# Altium PCB cable_test.PcbDoc (part 1 of 2)
Units mm, origin at the board's own origin, x right, y up, seen from the top; angles counter-clockwise.
Board outline 86.36 x 42.42 mm, 4 copper layers (Top Layer, GND, VCC, Bottom Layer), stack 1.873 mm thick; 118 components, 85 nets, 386 pads, 247 vias.
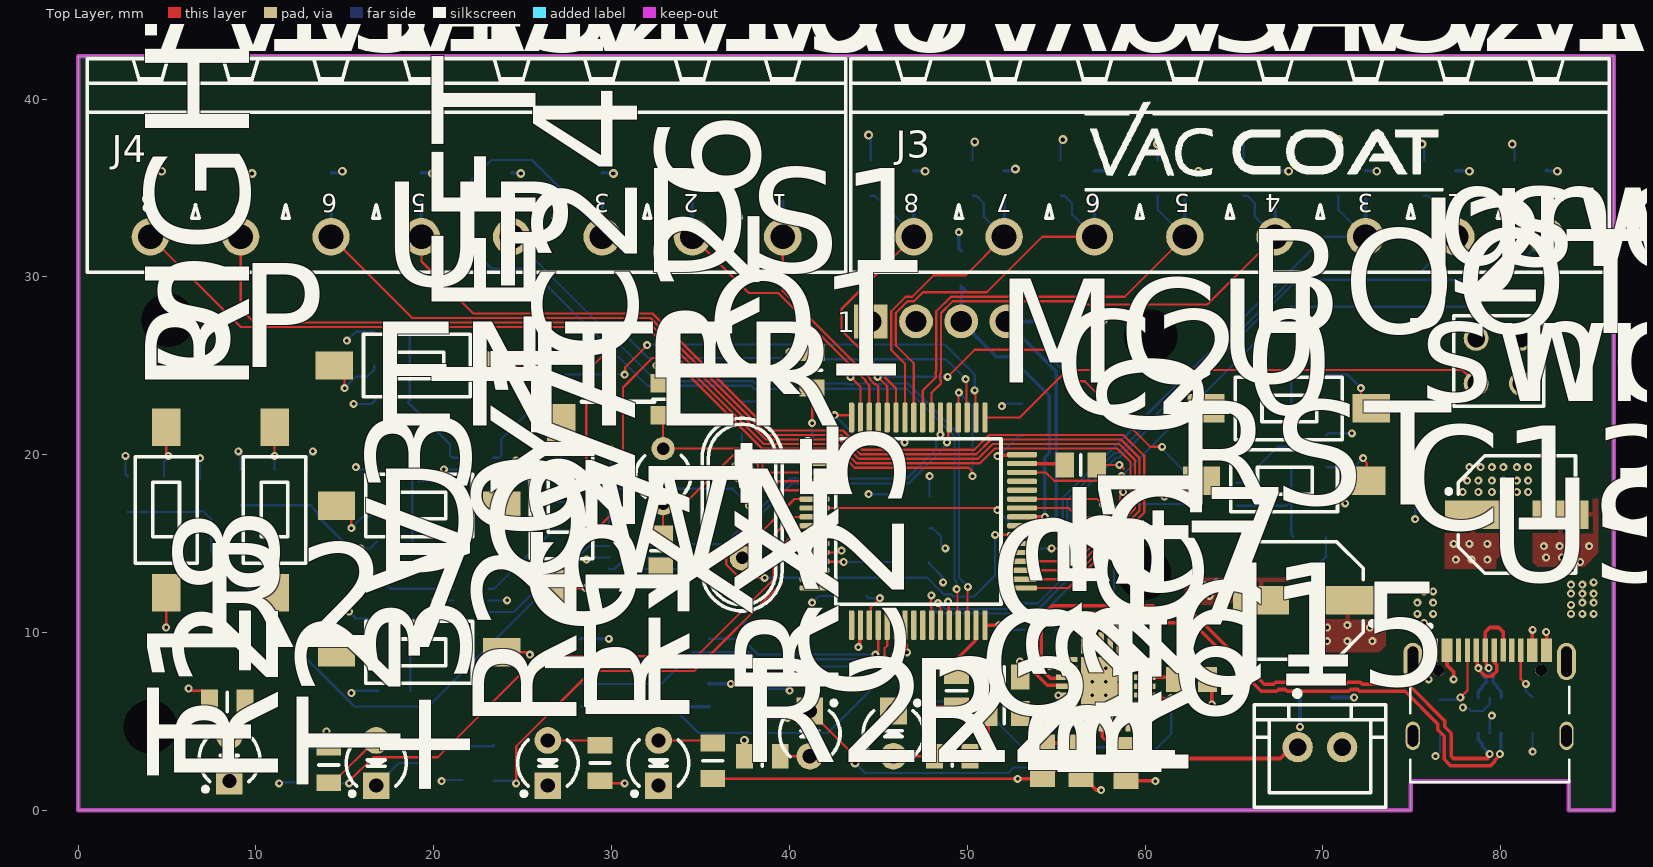
[diagram p0: Top Layer view]
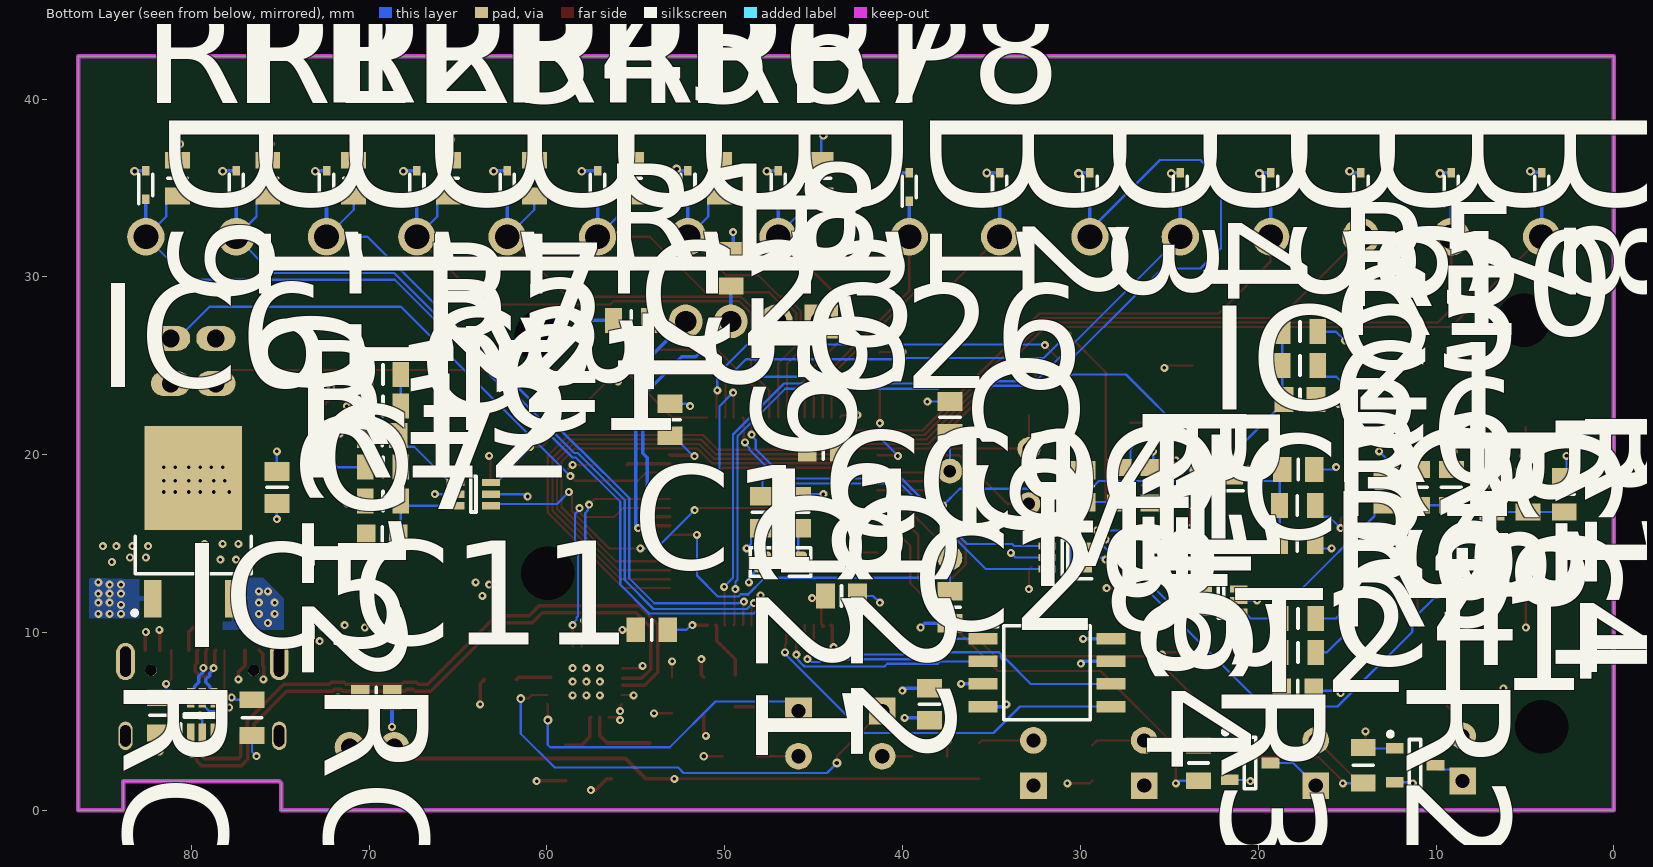
[diagram p1: Bottom Layer view, seen from below]
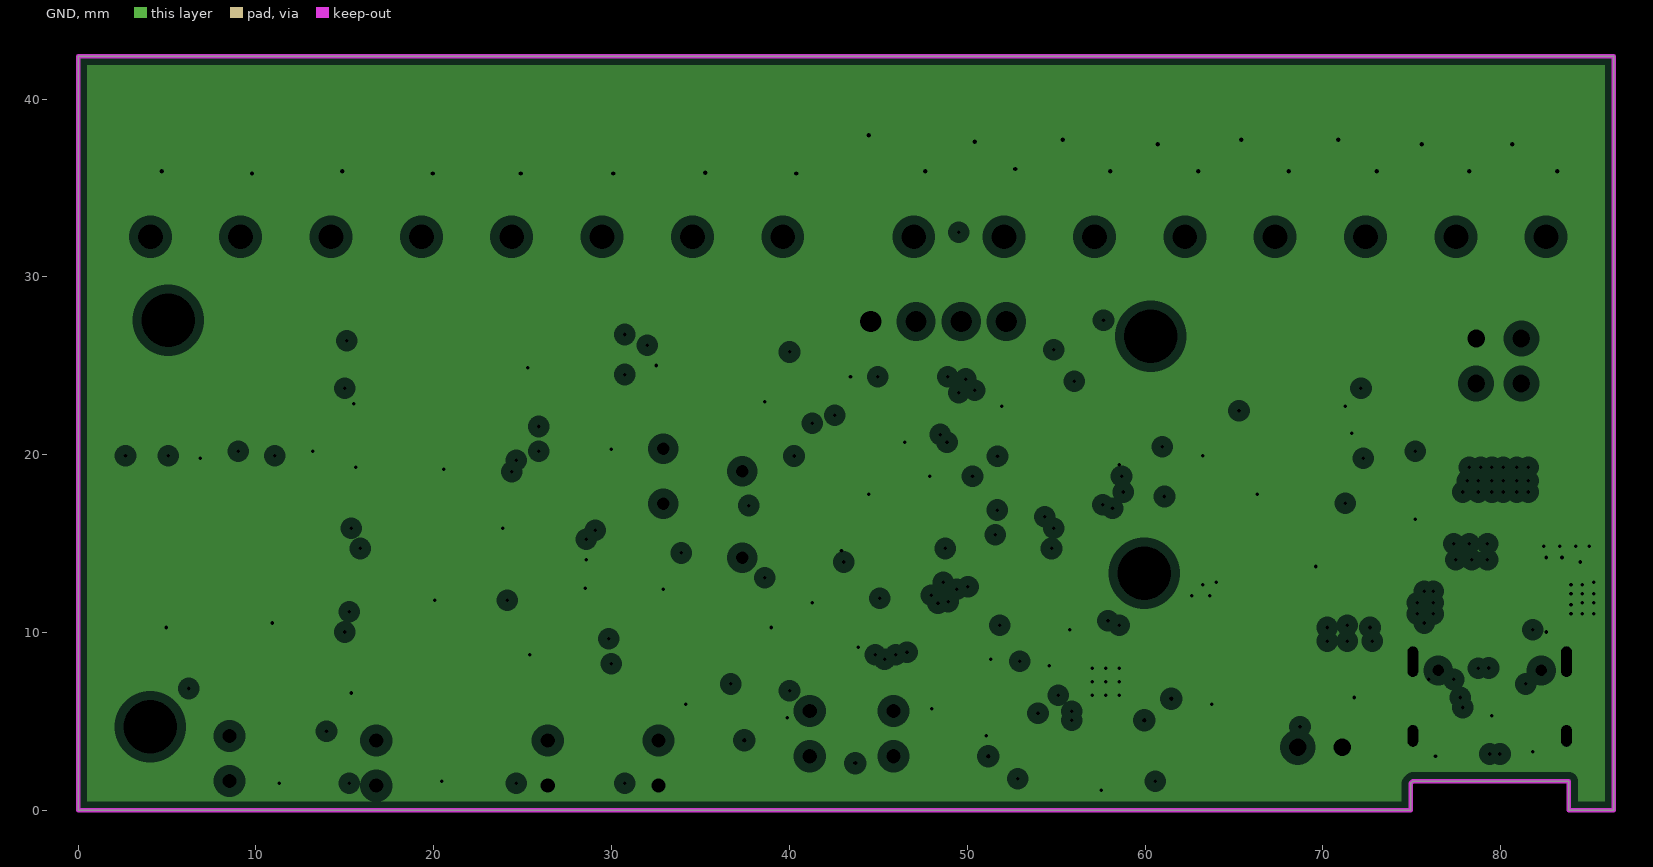
[diagram p2: GND, clearances drawn from the general rule]
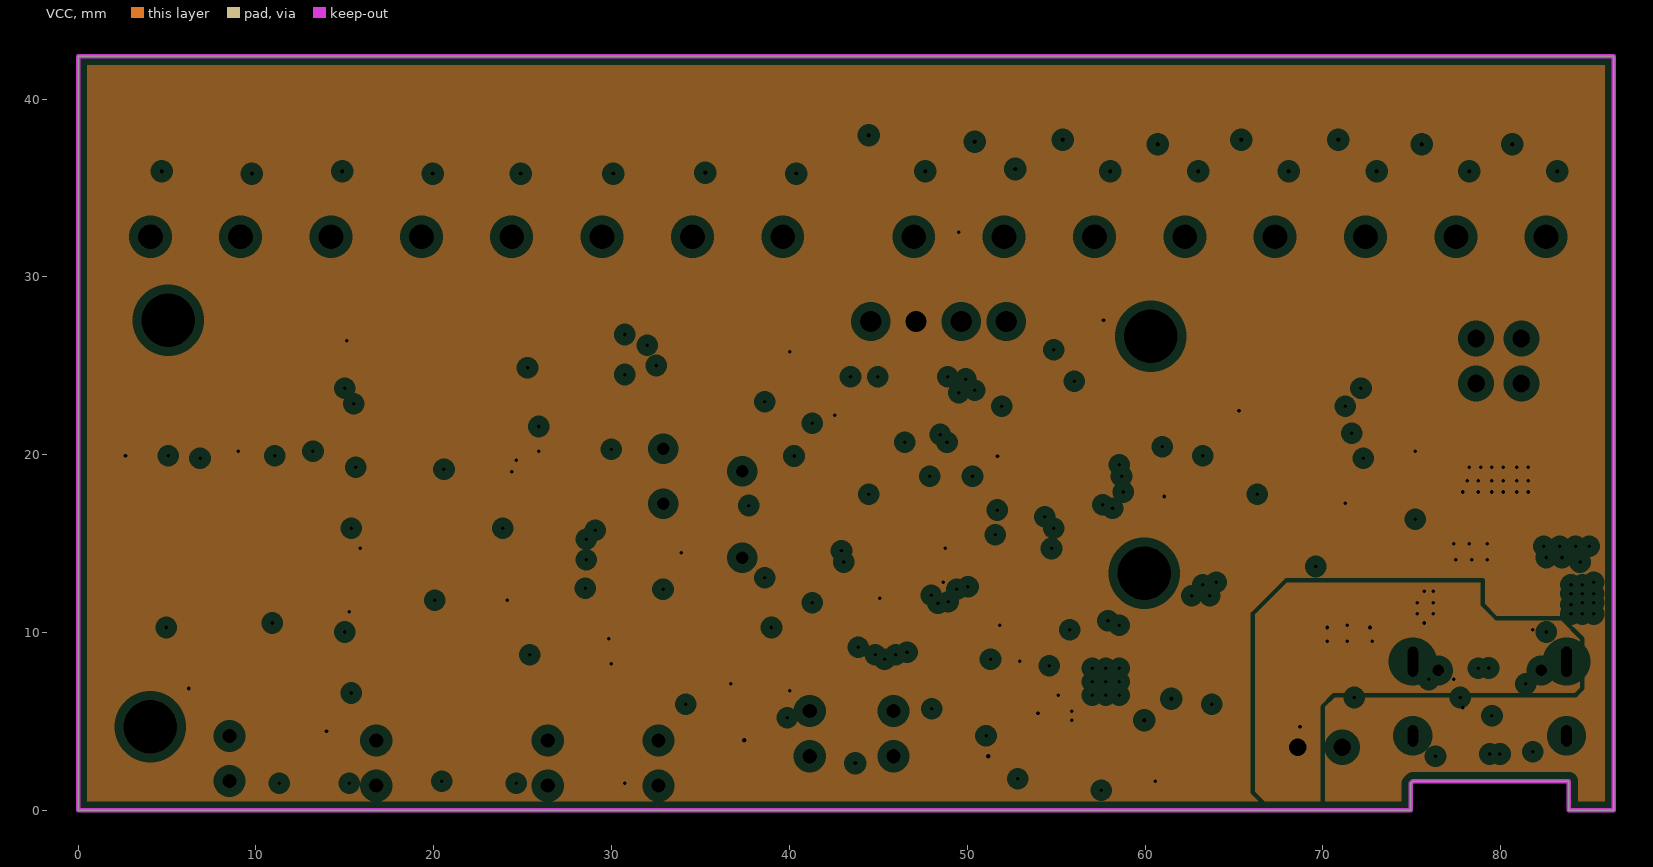
[diagram p3: VCC, clearances drawn from the general rule]

## Layer stack, top to bottom
Top Solder: solder mask 0.0102, Solder Resist, Dk 3.5
Top Layer: signal copper 0.0356
Dielectric 2: prepreg 0.0711, PP-006, Dk 4.1
GND: plane copper 0.035, net GND
Dielectric 1: dielectric 1.59, FR-4, Dk 4.8
VCC: plane copper 0.035, net (Multiple Nets)
Dielectric 3: prepreg 0.0711, PP-006, Dk 4.1
Bottom Layer: signal copper 0.0356
Bottom Solder: solder mask 0.0102, Solder Resist, Dk 3.5

## Board outline
0,0 0,42.418 86.36,42.418 86.36,0 83.82,0 83.82,1.651 75.057,1.651 74.93,1.524 74.93,0

## Design rules (kind name [scope] priority, off if disabled: settings)
Clearance [All] p1: gap=0.127 ignorepadtopadclearanceinfootprint=FALSE
DiffPairsRouting [All] p1: maxlimit=0.2 minlimit=0.2 mostfreqgap=0.2 toplayer_minwidth=0.2 toplayer_maxwidth=0.2 toplayer_prefwidth=0.2 bottomlayer_minwidth=0.2 bottomlayer_maxwidth=0.2 bottomlayer_prefwidth=0.2 maxuncoupledlength=12.7
PlaneClearance [All] p1: clearance=0.508
PlaneConnect [All] p1: planeconnectstyle=Relief reliefexpansion=0.508 reliefentries=4 reliefconductorwidth=0.254 reliefairgap=0.254
PolygonConnect [All] p1: connectstyle=Relief reliefconductorwidth=0.254 reliefentries=4 polygonreliefangle="90 Angle" airgapwidth=0.254
RoutingVias [All] p1: holewidth=0.2 width=0.45 viastyle="Through Hole" minholewidth=0.2 minwidth=0.45 maxholewidth=0.25 maxwidth=0.5
SolderMaskExpansion [All] p1: expansion=0.102 istentingtop=FALSE
SupplyNets "Schematic Supply Nets_1" [InNet('GND')] p1: voltage=0.000
SupplyNets "Schematic Supply Nets_2" [InNet('3V3')] p2: voltage=0.000
SupplyNets "Schematic Supply Nets" [InNet('+5')] p3: voltage=0.000
Width [All] p1: maxlimit=0.2 minlimit=0.127 preferedwidth=0.15
27 further rules are at their usual default settings.

## Classes and differential pairs
differential pair USB_FS: +USB_FS_P -USB_FS_N
differential pair D: +D_P -D_N

## Components (designator, comment, footprint, x,y, rotation, side; value= is the part's Value field where it differs from the comment)
+3V3 "Yellow" LED_3MM_YELLOW_1C-2A 26.416,2.667 r90 top (schematic designator LD2)
+5V "Yellow" LED_3MM_YELLOW_1C-2A 32.639,2.667 r90 top (schematic designator LD1)
BOOT "Push Button" PB_TYCO_FSMSM 68.072,22.606 r0 top (schematic designator BOOT1)
C1 "100nF" CAPC2012X135N 17.746,19.177 r0 bottom
C2 "100nF" CAPC2012X135N 69.265,21.082 r180 bottom
C3 "100nF" CAPC2012X135N 12.827,18.111 r270 bottom
C4 "100nF" CAPC2012X135N 17.78,6.731 r0 bottom
C5 "100nF" CAPC2012X135N 17.653,23.114 r0 bottom
C6 "100nF" CAPC2012X135N 6.858,17.73 r270 bottom
C7 "100nF" CAPC2012X135N 69.265,15.367 r180 bottom
C8 "100nF" CAPC2012X135N 29.845,18.238 r270 bottom
C9 "22pF" CAPC2012X135N 37.338,22.098 r270 bottom
C10 "68uF" CAPAE660X540N 68.961,11.811 r180 top
C11 "100nF" CAPC2012X135N 69.596,6.35 r180 bottom
C12 "100nF" CAPC2012X135N 75.184,18.161 r90 bottom
C13 "68uF" CAPAE660X540N 80.899,16.637 r0 top
C14 "22pF" CAPC2012X135N 37.338,11.43 r90 bottom
C15 "4.7u" CAPC2012X135N 62.611,7.366 r180 top
C16 "100nF" CAPC2012X135N 52.07,5.461 r0 top
C17 "100nF" CAPC2012X135N 52.07,7.493 r0 top
C18 "100nF" CAPC2012X135N 54.102,10.16 r180 bottom
C19 "100nF" CAPC2012X135N 43.434,12.065 r180 bottom
C20 "2.2uF" CAPC2012X135N 56.388,19.431 r0 top
C21 "100nF" CAPC2012X135N 47.879,16.764 r270 bottom
C22 "100nF" CAPC2012X135N 45.847,16.764 r270 bottom
C23 "100nF" CAPC2012X135N 53.086,21.971 r90 bottom
C24 "18pF" CAPC2012X135N 32.893,23.114 r270 top
C25 "2.2uF" CAPC2012X135N 49.403,6.731 r270 top
C26 "100nF" CAPC2012X135N 44.45,20.32 r180 bottom
C27 "18pF" CAPC2012X135N 32.766,14.605 r90 top
C28 "100nF" CAPC2012X135N 38.481,5.969 r270 bottom
D1 "PESD3V3L1UB,115" SODFL1608X65N 39.624,35.052 r90 bottom
D2 "PESD3V3L1UB,115" SODFL1608X65N 34.544,35.052 r90 bottom
D3 "PESD3V3L1UB,115" SODFL1608X65N 29.464,35.052 r90 bottom
D4 "PESD3V3L1UB,115" SODFL1608X65N 24.384,35.052 r90 bottom
D5 "PESD3V3L1UB,115" SODFL1608X65N 19.304,35.052 r90 bottom
D6 "PESD3V3L1UB,115" SODFL1608X65N 14.224,35.052 r90 bottom
D7 "PESD3V3L1UB,115" SODFL1608X65N 9.144,35.052 r90 bottom
D8 "PESD3V3L1UB,115" SODFL1608X65N 4.064,35.052 r90 bottom
D9 "PESD3V3L1UB,115" SODFL1608X65N 82.55,35.179 r90 bottom
D10 "PESD3V3L1UB,115" SODFL1608X65N 77.47,35.179 r90 bottom
D11 "PESD3V3L1UB,115" SODFL1608X65N 72.39,35.179 r90 bottom
D12 "PESD3V3L1UB,115" SODFL1608X65N 67.31,35.179 r90 bottom
D13 "PESD3V3L1UB,115" SODFL1608X65N 62.23,35.179 r90 bottom
D14 "PESD3V3L1UB,115" SODFL1608X65N 57.15,35.179 r90 bottom
D15 "PESD3V3L1UB,115" SODFL1608X65N 52.07,35.179 r90 bottom
D16 "PESD3V3L1UB,115" SODFL1608X65N 46.99,35.179 r90 bottom
DOWN "Push Button" PB_TYCO_FSMSM 19.177,8.89 r180 top (schematic designator DOWN1)
DS1 "MDOB128064V2V-WI" DS_MIDAS_MDOB128064V2V-WI 48.387,15.494 r0 top
ENTER "Push Button" PB_TYCO_FSMSM 19.177,17.145 r180 top (schematic designator ENTER1)
IC1 "74LVC2G17DW-7" SOT65P210X110-6N#1 64.135,17.78 r180 bottom
IC2 "74LVC2G17DW-7" SOT65P210X110-6N#1 22.352,19.177 r0 bottom
IC3 "74LVC2G17DW-7" SOT65P210X110-6N#1 22.098,11.811 r0 bottom
IC4 "74LVC2G17DW-7" SOT65P210X110-6N#1 30.861,14.224 r0 bottom
IC5 "" SOT65P210X110-6N#2 79.375,5.334 r90 bottom
IC6 "LD1117DT33CTR" TO228P972X240-3N-R540X510 79.883,16.256 r90 bottom
IC7 "CP2104-MINIEK" QFN50P400X400X80-25N-D 57.785,7.239 r0 top
J1 "Header 2" JST_B2B-XH-A(LF)(SN) 69.83,3.556 r180 top
J2 "Female Header dual 2" HDR_F_2X2 79.883,25.273 r90 top
J3 "" PHOENIX_1757307 64.77,32.258 r180 top
J4 "" PHOENIX_1757307 21.844,32.258 r180 top
L1 "Inductor SMD NC 0805" L0805 46.863,13.97 r180 bottom value=10uH
LEFT "Push Button" PB_TYCO_FSMSM 27.178,17.145 r90 top (schematic designator LEFT1)
M1 "W25Q64JVSSIQ_TR" SOIC127P790X216-8N 31.877,7.747 r180 bottom
MCU "STM32F405RGT6U" QFP50P1200X1200X160-64N 47.244,16.256 r0 top (schematic designator MCU1)
Q1 "8MHz" XTAL_CTS_ATS 37.338,16.637 r90 top
R1 "10K" RESC2012X60N 17.796,15.113 r180 bottom
R2 "10K" RESC2012X60N 69.215,22.733 r0 bottom
R3 "10K" RESC2012X60N 9.144,18.161 r90 bottom
R4 "10K" RESC2012X60N 17.764,10.795 r180 bottom
R5 "10K" RESC2012X60N 17.653,26.924 r180 bottom
R6 "1K" RESC2012X60N 17.796,17.145 r0 bottom
R7 "1K" RESC2012X60N 69.215,24.511 r180 bottom
R8 "1K" RESC2012X60N 11.049,18.161 r270 bottom
R9 "1K" RESC2012X60N 17.764,8.89 r0 bottom
R10 "1K" RESC2012X60N 17.653,25.019 r0 bottom
R11 "10K" RESC2012X60N 2.794,17.78 r90 bottom
R12 "10K" RESC2012X60N 69.215,17.399 r0 bottom
R13 "10K" RESC2012X60N 25.908,18.288 r90 bottom
R14 "1K" RESC2012X60N 4.826,17.78 r270 bottom
R15 "1K" RESC2012X60N 69.215,19.304 r180 bottom
R16 "1K" RESC2012X60N 27.813,18.288 r270 bottom
R17 "330" RESC2012X60N 35.687,2.794 r90 top
R18 "10K" RESC2012X60N 55.245,27.559 r0 bottom
R19 "10K" RESC2012X60N 49.657,30.48 r90 bottom
R20 "330" RESC2012X60N 29.337,2.667 r90 top
R21 "1K" RESC2012X60N 49.149,3.048 r180 top
R22 "1K" RESC2012X60N 38.481,3.048 r180 top
R23 "24K" RESC2012X60N 54.229,2.794 r270 top
R24 "10K" RESC2012X60N 58.928,2.667 r90 top
R25 "27K" RESC2012X60N 56.388,2.794 r90 top
R26 "0" RESC2012X60N 41.275,24.749 r270 top
R27 "330" RESC2012X60N 8.382,6.096 r180 top
R28 "330" RESC2012X60N 14.097,2.556 r90 top
R29 "330" RESC2012X60N 14.097,2.54 r90 bottom
R30 "330" RESC2012X60N 23.368,2.667 r90 bottom
RCC1 "5.1k" RESC2012X60N 76.581,5.223 r90 bottom
RCC2 "5.1k" RESC2012X60N 81.788,5.35 r90 bottom
RIGHT "Push Button" PB_TYCO_FSMSM 11.049,16.891 r90 top (schematic designator RIGHT1)
RP1 "10K" RESC2012X60N 80.772,35.56 r270 bottom
RP2 "10K" RESC2012X60N 75.692,35.56 r270 bottom
RP3 "10K" RESC2012X60N 70.866,35.56 r270 bottom
RP4 "10K" RESC2012X60N 65.532,35.56 r270 bottom
RP5 "10K" RESC2012X60N 60.706,35.56 r270 bottom
RP6 "10K" RESC2012X60N 55.245,35.56 r270 bottom
RP7 "10K" RESC2012X60N 50.292,35.56 r270 bottom
RP8 "10K" RESC2012X60N 44.577,35.56 r270 bottom
RST "Push Button" PB_TYCO_FSMSM 67.818,18.542 r0 top (schematic designator RST2)
RX1 "Yellow" LED_3MM_YELLOW_1C-2A 45.847,4.318 r270 top
SP "Push Button" PB_TYCO_FSMSM 4.953,16.891 r90 top (schematic designator RST1)
T1 "BC817-25" SOT95P230X110-3N 11.176,2.54 r180 bottom
T1 "Green" LED_3MM_GREEN_1C-2A 8.509,2.921 r90 top (schematic designator LD3)
T2 "BC817-25" SOT95P230X110-3N 20.454,2.667 r180 bottom
T2 "Green" LED_3MM_GREEN_1C-2A 16.764,2.667 r90 top (schematic designator LD4)
TX1 "Green" LED_3MM_GREEN_1C-2A 41.148,4.318 r270 top
UP "Push Button" PB_TYCO_FSMSM 19.05,25.019 r180 top (schematic designator UP1)
USB "CQ-USB-C16PSMT01" SHENZHEN-CHUANGQIN-TECHNOLOGY_CQ-USB-C16PSMT01 79.373,9.011 r0 top (schematic designator USB1)
Y1 "Crystal RTC" "Crystal Clock" 32.893,18.796 r270 top

## Footprints (in the part's own frame and the unit in brackets; to place one, negate y for a bottom-side part, rotate by r counter-clockwise, add the part's x,y. Pads: shape width x height; smd on the part's side, far side on the other; paste and mask are expansions set on the pad)
CAPAE660X540N [mm] "Capacitor, Aluminium Electrolytric, 6.6mm L X 6.6mm W X 5.4mm H, IPC Medium Density"
  rect 3.15x1.6 smd: 1(-2.45,0) 2(2.45,0)
  silkscreen extent -3.95,-3.3 3.3,3.3, body extent -3.9,-3.4 3.9,3.4, height 5.7
CAPC2012X135N [mm] "Chip Capacitor, Body 2.0x1.25mm, IPC Medium Density"
  rect 1.05x1.4 smd: 1(-0.9,0) 2(0.9,0)
  silkscreen extent 0,-0.58 0,0.58, body extent -1.05,-0.67 1.05,0.68, height 1.25
"Crystal Clock" [mm]
  round 1.3 hole 0.7: 1(-1.55,0) 2(1.55,0)
  silkscreen extent -1.17,-1.55 1.19,1.55, body extent -1.65,-1.6 1.8,1.6, height 9.53
DS_MIDAS_MDOB128064V2V-WI [mm] "LCD Display Module, 128 x 64 Dots Matrix, Body 27.3x27.3mm"
  rect 1.9x1.9 hole 1.2: 1(-3.81,12)
  round 1.9 hole 1.2: 2(-1.27,12) 3(1.27,12) 4(3.81,12)
  body extent -13.65,-13.65 13.65,13.65, height 3.87
HDR_F_2X2 [mm]
  round 1.4 / inner round 1.4 / far side oval 1.4x2.2 hole 1: 1(-1.27,1.27) 2(-1.27,-1.27) 3(1.27,1.27) 4(1.27,-1.27)
  silkscreen extent -2.54,-2.54 2.54,2.54, body extent -2.54,-2.54 2.54,2.54, height 8.5
JST_B2B-XH-A(LF)(SN) [mm] "2.5mm Pitch, 2 Contacts Top Entry Type Shrouded Header"
  round 1.7 hole 1: 1(1.25,0) 2(-1.25,0)
  silkscreen extent -3.7,-3.17 3.7,3.38, body extent -3.7,-2.37 3.7,3.38, height 7
L0805 [mm]
  rrect50% 1x1.2 smd mask+0.075: 1(-1,0) 2(1,0)
  Top Layer pour cut-out: -0.5,0.8 0.5,0.8 0.5,-0.8 -0.5,-0.8
  silkscreen extent -1.7,-0.8 1.7,0.8, body extent -1,-0.6 1,0.6, height 0.95
LED_3MM_GREEN_1C-2A [mm] "LED, Green, Body Dia. 3.43 mm, Pin spacing 2.54mm"
  rect 1.5x1.5 hole 0.8: 1(-1.27,0)
  round 1.5 hole 0.8: 2(1.27,0)
  silkscreen extent -1.85,-1.7 1.3,1.7, body extent -1.71,-1.71 1.72,1.72, height 9.85
LED_3MM_YELLOW_1C-2A [mm] "LED, Red, Body Dia. 3.43 mm, Pin spacing 2.54mm"
  rect 1.5x1.5 hole 0.8: 1(-1.27,0)
  round 1.5 hole 0.8: 2(1.27,0)
  silkscreen extent -1.85,-1.7 1.3,1.7, body extent -1.71,-1.71 1.72,1.72, height 9.85
PB_TYCO_FSMSM [mm] "Body 3.5x6.0mm, Pushbutton Switch,  TYCO FSMSM Serie"
  rect 2.1x1.6 smd: 1(-4.65,0) 2(4.65,0)
  silkscreen extent -3,-1.75 3,1.75, body extent -5,-1.75 5,1.75, height 4.3
PHOENIX_1757307 [mm] "PHOENIX MSTBA Serie, Pitch 5.08mm, 12A, 250V, 8 Positions Header"
  round 2.1 hole 1.4: 1(-17.78,0) 2(-12.7,0) 3(-7.62,0) 4(-2.54,0) 5(2.54,0) 6(7.62,0) 7(12.7,0) 8(17.78,0)
  silkscreen extent -21.32,-10 21.32,2, body extent -21.32,-10 21.32,2, height 8.6
QFN50P400X400X80-25N-D [mm]
  rect 1.2x0.3 smd: 1(-2.2,1.25) 2(-2.2,0.75) 3(-2.2,0.25) 4(-2.2,-0.25) 5(-2.2,-0.75) 6(-2.2,-1.25) 13(2.2,-1.25) 14(2.2,-0.75) 15(2.2,-0.25) 16(2.2,0.25) 17(2.2,0.75) 18(2.2,1.25)
  rect 0.3x1.2 smd: 7(-1.25,-2.2) 8(-0.75,-2.2) 9(-0.25,-2.2) 10(0.25,-2.2) 11(0.75,-2.2) 12(1.25,-2.2) 19(1.25,2.2) 20(0.75,2.2) 21(0.25,2.2) 22(-0.25,2.2) 23(-0.75,2.2) 24(-1.25,2.2)
  rect 2.8x2.8 smd: 25(0,0)
  silkscreen extent -2.52,1.88 -2.27,2.12, body extent -2.05,-2.05 2.05,2.05, height 0.8
QFP50P1200X1200X160-64N [mm]
  rrect50% 1.675x0.3 smd: 1(-5.838,3.75) 2(-5.838,3.25) 3(-5.838,2.75) 4(-5.838,2.25) 5(-5.838,1.75) 6(-5.838,1.25) 7(-5.838,0.75) 8(-5.838,0.25) 9(-5.838,-0.25) 10(-5.838,-0.75) 11(-5.838,-1.25) 12(-5.838,-1.75) 13(-5.838,-2.25) 14(-5.838,-2.75) 15(-5.838,-3.25) 16(-5.838,-3.75) 33(5.838,-3.75) 34(5.838,-3.25) 35(5.838,-2.75) 36(5.838,-2.25) 37(5.838,-1.75) 38(5.838,-1.25) 39(5.838,-0.75) 40(5.838,-0.25) 41(5.838,0.25) 42(5.838,0.75) 43(5.838,1.25) 44(5.838,1.75) 45(5.838,2.25) 46(5.838,2.75) 47(5.838,3.25) 48(5.838,3.75)
  rrect50% 0.3x1.675 smd: 17(-3.75,-5.838) 18(-3.25,-5.838) 19(-2.75,-5.838) 20(-2.25,-5.838) 21(-1.75,-5.838) 22(-1.25,-5.838) 23(-0.75,-5.838) 24(-0.25,-5.838) 25(0.25,-5.838) 26(0.75,-5.838) 27(1.25,-5.838) 28(1.75,-5.838) 29(2.25,-5.838) 30(2.75,-5.838) 31(3.25,-5.838) 32(3.75,-5.838) 49(3.75,5.838) 50(3.25,5.838) 51(2.75,5.838) 52(2.25,5.838) 53(1.75,5.838) 54(1.25,5.838) 55(0.75,5.838) 56(0.25,5.838) 57(-0.25,5.838) 58(-0.75,5.838) 59(-1.25,5.838) 60(-1.75,5.838) 61(-2.25,5.838) 62(-2.75,5.838) 63(-3.25,5.838) 64(-3.75,5.838)
  silkscreen extent -6.35,-4.65 4.65,4.65, body extent -6,-6 6,6, height 1.31
RESC2012X60N [mm] "Chip Resistor, EIA 0805, Metric 2012, Body 2.0x1.2mm, IPC Medium Density"
  rect 0.95x1.4 smd: 1(-1,0) 2(1,0)
  silkscreen extent 0,-0.55 0,0.55, body extent -1.1,-0.67 1.1,0.68, height 0.6
SHENZHEN-CHUANGQIN-TECHNOLOGY_CQ-USB-C16PSMT01 [mm]
  rect 0.6x1.3 smd: A1_B12(-3.2,0) A4_B9(-2.4,0) B1_A12(3.2,0) B4_A9(2.4,0)
  rect 0.3x1.3 smd: A5(-1.25,0) A6(-0.25,0) A7(0.25,0) A8(1.25,0) B5(1.75,0) B6(0.764,0.006) B7(-0.75,0) B8(-1.75,0)
  oval 1.05x2.1 hole 0.6 slot 1.7 at 90 deg: S1(-4.32,-0.64) S2(4.32,-0.64)
  oval 0.8x1.6 hole 0.6 slot 1.2 at 90 deg: S3(-4.32,-4.82) S4(4.32,-4.82)
  round 0.65 hole 0.65 unplated: ""(-2.89,-1.14) ""(2.89,-1.14)
  silkscreen extent -4.47,-7.42 4.47,1.45, body extent -4.47,-3.91 4.47,3.91, height 3.26
SODFL1608X65N [mm]
  rect 0.53x0.42 smd: 1(-0.8,0) 2(0.8,0)
  silkscreen extent -1.06,-0.4 0.6,0.4, body extent -0.8,-0.42 0.8,0.41, height 0.61
SOIC127P790X216-8N [mm]
  rect 1.65x0.65 smd: 1(-3.6,1.905) 2(-3.6,0.635) 3(-3.6,-0.635) 4(-3.6,-1.905) 5(3.6,-1.905) 6(3.6,-0.635) 7(3.6,0.635) 8(3.6,1.905)
  silkscreen extent -4.43,-2.64 2.42,2.64, body extent -3.95,-2.64 3.95,2.64, height 2.16
SOT65P210X110-6N#1 [mm]
  rect 1x0.4 smd: 1(-1,0.65) 2(-1,0) 3(-1,-0.65) 4(1,-0.65) 5(1,0) 6(1,0.65)
  silkscreen extent -1.5,-1 0.15,1.2, body extent -1.05,-1.07 1.05,1.07, height 1.1
SOT65P210X110-6N#2 [mm]
  rect 1.1x0.4 smd: 1(-1,0.65) 2(-1,0) 3(-1,-0.65) 4(1,-0.65) 5(1,0) 6(1,0.65)
  silkscreen extent -1.55,-1 0.1,1.2, body extent -1.05,-1 1.05,1, height 1.1
SOT95P230X110-3N [mm] "SOT23, 3 pin, Pitch 0.95mm - 1.3mm W X 2.9mm L X 1.1mm H, IPC Medium Density"
  rect 1x0.6 smd: 1(-1.15,0.95) 2(-1.15,-0.95) 3(1.15,0)
  silkscreen extent -1.53,-1.45 0.33,1.87, body extent -1.08,-1.5 1.25,1.5, height 1.1
TO228P972X240-3N-R540X510 [mm] "TO-252 DPAK TO, 2.28mm Pitch; 2 Pin, 9.725mm L X 6.50mm W X 2.40mm H body, IPC Medium Density"
  rect 2.1x1 smd: 1(-4.35,2.28) 2(-4.35,-2.28)
  rect 5.85x5.5 smd: 3(2.45,0)
  silkscreen extent -5.27,-3.25 -0.85,3.43, body extent -4.9,-3.3 4.82,3.3, height 2.4
XTAL_CTS_ATS [mm] "CTS Case Body 10.85x4.5mm; Pitch 4.88mm"
  round 1.4 hole 0.7: 1(-2.44,0) 2(2.44,0)
  silkscreen extent -5.42,-2.25 5.42,2.25, body extent -5.42,-2.25 5.43,2.25, height 3.68

## Part data
+3V3 +5V RX1: library part LED_AVAGO_HLMP-1719, "LED Yellow 1C 2A", Manufacturer="AVAGO TECHNOLOGIES", Manufacturer Part Number=HLMP-1719, Author="CERN DEM JLC", Bonding=No, Color=Yellow, Component Type=Standard, ComponentHeight=6.35mm(min), CreateDate=6/12/2008, HelpURL=\\cern.ch\dfs\Applications\Altium\Datasheets\LED_AVAGO_HLMP-1719.pdf, LatestRevisionDate=3/17/2010, Mounted=Yes, PackageDescription="LED, Yellow, Body Dia. 3.43 mm, Pin spacing 2.54mm", Part Description="3mm Yellow LED", Part Number=LED_AVAGO_HLMP-1719, Pin Count=2, PressFit=No, Sense=No, SMD=No, Socket=No
BOOT DOWN ENTER LEFT RIGHT RST SP UP: library part PB_TYCO_FSMSM, "Push-Button Switch SPST", Manufacturer="TYCO ELECTRONICS", Manufacturer Part Number="FSMSM or 1437566-3", Author="CERN DEM JLC", Component Type=Standard, ComponentHeight=4.3mm, CreateDate=6/30/2008, Family="Push Button", HelpURL=\\cern.ch\dfs\Applications\Altium\Datasheets\PB_TYCO_FSMSM.pdf, LatestRevisionDate=6/21/2012, Mounted=Yes, PackageDescription="Body 3.5x6.0mm, Pushbutton Switch, TYCO ALCOSWITCH FSMSM Serie", Part Description="12VDC 50mA SPST Tactile Push-Button Switch", Part Number=PB_TYCO_FSMSM, Pin Count=2, PressFit=No, Sense=No, SMD=Yes, Socket=No, Status=None
C1 C2 C3 C4 C5 C6 C7 C8 C9 C11 C12 C14 C15 C16 C17 C18 C19 C20 C21 C22 C23 C24 C25 C26 C27: library part CC0805_100NF_50V_10%_X7R, "Non-polarised capacitor", Case=0805, Manufacturer=GENERIC, Manufacturer1 ComponentHeight=1mm, Manufacturer1 Example=TDK, Manufacturer1 Part Number=C2012X7R1H104K085, Tolerance=±10%, Voltage=50V, Author="CERN DEM JLC", Component Type=Standard, CreateDate=12/3/2007, HelpURL=\\cern.ch\dfs\Applications\Altium\Datasheets\CC0805_X7R_TDK_C.pdf, LatestRevisionDate=4/22/2015, Manufacturer Part Number=CC0805_100NF_50V_10%_X7R, Mounted=Yes, Part Description="SMD Multilayer Chip Ceramic Capacitor", Part Number=CC0805_100NF_50V_10%_X7R, Pin Count=2, Sense=No, SMD=Yes, Socket=No, Status=None, TC=X7R
C10 C13: library part CAE660-540_220UF_6.3V_20%, "Polarised capacitor", Case=D, Manufacturer=PANASONIC, Manufacturer Part Number=EEEFK0J221AP, Tolerance=±20%, Voltage=6.3V, Author="CERN DEM JLC", Component Type=Standard, ComponentHeight=5.8mm, CreateDate=12/3/2007, HelpURL=\\cern.ch\dfs\Applications\Altium\Datasheets\CAE_PANASONIC_FK-V.pdf, LatestRevisionDate=11/5/2014, Mounted=Yes, Part Description="Aluminum Electrolytic SMT Capacitor", Part Number=CAE660-540_220UF_6.3V_20%, Pin Count=2, Sense=No, SMD=Yes, Socket=No, Status="Not Recommended"
C28: library part CC0805_1.2PF_50V_0.25PF_NP0, "Non-polarised capacitor", Case=0805, Manufacturer=GENERIC, Manufacturer1 ComponentHeight=1.35mm, Manufacturer1 Example=PHYCOMP, Manufacturer1 Part Number=223886114128, Tolerance=±0.25pF, Voltage=50V, Author="CERN DEM JLC", Component Type=Standard, CreateDate=12/3/2007, HelpURL=\\cern.ch\dfs\Applications\Altium\Datasheets\CC0805_NP0_PHYCOMP.pdf, LatestRevisionDate=12/3/2007, Manufacturer Part Number=CC0805_1.2PF_50V_0.25PF_NP0, Mounted=Yes, Part Description="SMD Multilayer Chip Ceramic Capacitor", Part Number=CC0805_1.2PF_50V_0.25PF_NP0, Pin Count=2, Sense=No, SMD=Yes, Socket=No, Status="Not Recommended", TC=C0G/NP0
D1 D2 D3 D4 D5 D6 D7 D8 D9 D10 D11 D12 D13 D14 D15 D16: "Diode ESD (Uni-directional)", Manufacturer_Name=Nexperia, Mouser Part Number=771-PESD3V3L1UB115, Arrow Part Number=PESD3V3L1UB,115, Arrow Price/Stock=https://www.arrow.com/en/products/pesd3v3l1ub115/nexperia?region=nac, Datasheet Link=https://assets.nexperia.com/documents/data-sheet/PESD3V3L1UB.pdf, Height=0.65mm, Manufacturer_Part_Number=PESD3V3L1UB,115, Mouser Price/Stock=https://www.mouser.co.uk/ProductDetail/Nexperia/PESD3V3L1UB115?qs=LMSg3oBIm%2Fjt%252BUjwy43%2Fgg%3D%3D
DS1: library part DS_MIDAS_MDOB128064V2V-WI, "LCD Display, Display Color White, I2C Bus Data Interface, 128 x 64 Dots Matrix", Manufacturer="MIDAS DISPLAY", Author="CERN DEM BC", Bonding=No, Component Type=Standard, ComponentHeight=3.87mm, CreateDate=1/27/2020, Device=MDOB128064V2V-WI, HelpURL=\\cern.ch\dfs\Applications\Altium\Datasheets\DS_MIDAS_MDOB128064V2V-WI.pdf, LatestRevisionDate=1/27/2020, Manufacturer Part Number=MDOB128064V2V-WI, Mounted=Yes, PackageDescription="LCD Display Module, 128 x 64 Dots Matrix, Body 27.3x27.3mm", Part Description="LCD Display, Display Color White, I2C Bus Data Interface, 128 x 64 Dots Matrix", Part Number=DS_MIDAS_MDOB128064V2V-WI, Pin Count=4, PressFit=No, Sense=Yes, Sense Comment="Manual Soldering and Non-washable", SMD=No, Socket=No, Status Comment="Sensitive (See Sensitive Field)"
IC1 IC2 IC3 IC4: "Integrated Circuit", Manufacturer_Name="Diodes Incorporated", Mouser Part Number=621-74LVC2G17DW-7, Arrow Part Number=74LVC2G17DW-7, Arrow Price/Stock=https://www.arrow.com/en/products/74lvc2g17dw-7/diodes-incorporated?utm_currency=USD&region=nac, Datasheet Link=https://www.diodes.com//assets/Datasheets/74LVC2G17.pdf, Height=1.1mm, Manufacturer_Part_Number=74LVC2G17DW-7, Mouser Price/Stock=https://www.mouser.co.uk/ProductDetail/Diodes-Incorporated/74LVC2G17DW-7?qs=MKoP7Oyr0W5RvcSrLnJhQA%3D%3D
IC5: library part USBUF02W6, "Integrated Circuit", Voltage=8KV, Category=Diode, IPN=1245, Mounting Type=SMD
IC6: "3-Terminal Regulator 1=GND 2=IN 3=OUT", Case=DPAK, Manufacturer="ST MICROELECTRONICS", Author="CERN DEM JLC", Bonding=No, Component Type=Standard, ComponentHeight=2.4mm, CreateDate=6/8/2011, Device=LD1117DT33CTR, HelpURL=\\cern.ch\dfs\Applications\Altium\Datasheets\LD1117DT33CTR.pdf, LatestRevisionDate=6/8/2011, Manufacturer Part Number=LD1117DT33CTR, Mounted=Yes, PackageDescription="TO-252 DPAK TO, 2.28mm Pitch; 2 Pin, 9.725mm L X 6.10mm W X 2.40mm H body, IPC Medium Density", Part Description="3.3V 800mA Low drop fixed and adjustable positive voltage regulators", Part Number=LD1117DT33CTR, Pin Count=3, PressFit=No, Sense=No, SMD=Yes, Socket=No
IC7: "Integrated Circuit", Manufacturer_Name="Silicon Labs", Mouser Part Number=634-CP2104-MINIEK, Arrow Part Number=CP2104-MINIEK, Arrow Price/Stock=https://www.arrow.com/en/products/cp2104-miniek/silicon-labs?utm_currency=USD&region=nac, Datasheet Link=https://www.silabs.com/documents/public/data-sheets/cp2104.pdf, Height=0.8mm, Manufacturer_Part_Number=CP2104-MINIEK, Mouser Price/Stock=https://www.mouser.co.uk/ProductDetail/Silicon-Labs/CP2104-MINIEK?qs=FYfXKmhrYXPeBq%2FwIaWTFg%3D%3D
J1: library part JST_B2B-XH-A(LF)(SN), "Connector 2 Male", Manufacturer="JST (JAPAN SOLDERLESS TERMINALS)", Manufacturer Part Number=B2B-XH-A(LF)(SN), Author="CERN DEM JLC", Component Type=Standard, ComponentHeight=7mm, CreateDate=8/14/2014, Family="Header 2", HelpURL=\\cern.ch\dfs\Applications\Altium\Datasheets\JST_B2B-XH-A(LF)(SN).pdf, LatestRevisionDate=8/14/2014, Mounted=Yes, Part Description="2 Contacts, 2.5mm Pitch, Top Entry Type Shrouded Header", Part Number=JST_B2B-XH-A(LF)(SN), Pin Count=2, PressFit=No, Sense=No, SMD=No, Socket=No, Status=None
J2: "Female, pitch: 2.54mm", Category=Connector
J3 J4: library part PHOENIX_1757307, "Connector 8 Male", Manufacturer="PHOENIX CONTACT", Manufacturer Part Number="1757307 (MSTBA 2,5/ 8-G-5,08)", Author="CERN DEM JLC", Component Type=Standard, ComponentHeight=8.6mm, CreateDate=2/10/2010, HelpURL=\\cern.ch\dfs\Applications\Altium\Datasheets\PHOENIX_1757307.pdf, LatestRevisionDate=4/26/2010, Mounted=Yes, Part Description="12A, 250V, Pitch 5.08mm, 8 Positions Header", Part Number=PHOENIX_1757307, Pin Count=8, PressFit=No, Sense=No, SMD=No, Socket=No, Status=None
L1: Current=200mA, Package=0805, Category=inductor, IPN=1030, Mounting Type=SMD
M1: "Integrated Circuit", Arrow Part Number="W25Q64JVSSIQ TR", Manufacturer_Name=Winbond, Mouser Part Number=454-W25Q64JVSSIQTR, Arrow Price/Stock=https://www.arrow.com/en/products/w25q64jvssiqtr/winbond-electronics?utm_currency=USD&region=nac, Datasheet Link=http://www.winbond.com/resource-files/w25q64jv%20spi%20revg%2012142016.pdf, Height=2.16mm, Manufacturer_Part_Number="W25Q64JVSSIQ TR", Mouser Price/Stock=https://www.mouser.co.uk/ProductDetail/Winbond/W25Q64JVSSIQ-TR?qs=qSfuJ%252Bfl%2Fd6FZTXsjBFnrA%3D%3D
MCU: "Integrated Circuit", Manufacturer_Name=STMicroelectronics, Mouser Part Number=511-STM32F405RGT6U, Height=1.6mm, Manufacturer_Part_Number=STM32F405RGT6U, Mouser Price/Stock=https://www.mouser.co.uk/ProductDetail/STMicroelectronics/STM32F405RGT6U?qs=4ccVDqXDOrkfyBTYAli8sw%3D%3D
Q1: library part XTAL_10MHZ_CTS_ATS100B-E, "Quartz Crystal", Manufacturer=CTS, Manufacturer Part Number=ATS100B-E, Author="CERN DEM HF", Bonding=No, Component Type=Standard, ComponentHeight=3.3mm, CreateDate=10/25/2022, HelpURL=\\cern.ch\dfs\Applications\Altium\Datasheets\XTAL_CTS_ATS.pdf, LatestRevisionDate=10/25/2022, Mounted=Yes, PackageDescription="THD Crystal,HC-49/US Case Body 10.85x4.5mm; Pitch 4.88mm", Part Description="Tolerance: ±30ppm, Stability: ±50ppm, -40°C to +85°C, 18pF, 40 Ohms ESR, Quartz Crystal, ATS Series", Part Number=XTAL_10MHZ_CTS_ATS100B-E, Pin Count=2, PressFit=No, Sense=No, SMD=No, Socket=No
R1 R2 R3 R4 R5 R6 R7 R8 R9 R10 R11 R12 R13 R14 R15 R16 R17 R18 R19 R20 R21 R22 R23 R24 R25 R26 R27 R28 R29 R30 RCC1 RCC2 RP1 RP2 RP3 RP4 RP5 RP6 RP7 RP8: library part R0805_24K_1%_0.125W_100PPM, "Resistor - 1%", Case=0805, Manufacturer=GENERIC, Manufacturer1 ComponentHeight=0.6mm, Manufacturer1 Example="NIC COMPONENT", Manufacturer1 Part Number=NRC10F2402TRF, Power=0.125W, Tolerance=±1%, Author="CERN DEM JLC", Component Type=Standard, CreateDate=12/3/2007, HelpURL=\\cern.ch\dfs\Applications\Altium\Datasheets\R0805_NIC_NRC.pdf, LatestRevisionDate=3/13/2008, Manufacturer Part Number=R0805_24K_1%_0.125W_100PPM, Mounted=Yes, Part Description="General Purpose Thick Film Chip Resistor", Part Number=R0805_24K_1%_0.125W_100PPM, Pin Count=2, PressFit=No, Sense=No, SMD=Yes, Socket=No, Status=Preferred, TC=±100ppm/°C
T1 T2: "NPN Transistor", Case=SOT23-3, Manufacturer="NXP SEMICONDUCTORS", Author="CERN DEM JLC", Bonding=No, Component Type=Standard, ComponentHeight=1.1mm, CreateDate=10/28/2014, Device=BC817-25, HelpURL=\\cern.ch\dfs\Applications\Altium\Datasheets\BC817-25.pdf, LatestRevisionDate=10/28/2014, Manufacturer Part Number=BC817-25, Mounted=Yes, PackageDescription="SOT23, 0.95mm Pitch; 3 Pin, 1.30mm W X 2.90mm L X 1.10mm H body, IPC Medium Density", Part Description="45V 500mA NPN General-Purpose Transistor", Part Number=BC817-25, Pin Count=3, PressFit=No, Sense=No, SMD=Yes, Socket=No
T1 T2 TX1: library part LED_AVAGO_HLMP-1790, "LED Green 1C 2A", Manufacturer="AVAGO TECHNOLOGIES", Manufacturer Part Number=HLMP-1790, Author="CERN DEM JLC", Bonding=No, Color=Green, Component Type=Standard, ComponentHeight=6.35mm(min), CreateDate=6/12/2008, HelpURL=\\cern.ch\dfs\Applications\Altium\Datasheets\LED_AVAGO_HLMP-1790.pdf, LatestRevisionDate=3/17/2010, Mounted=Yes, PackageDescription="LED, Green, Body Dia. 3.43 mm, Pin spacing 2.54mm", Part Description="3mm Green LED", Part Number=LED_AVAGO_HLMP-1790, Pin Count=2, PressFit=No, Sense=No, SMD=No, Socket=No
USB: "C Type USB Type-C Female Plug 16 Pin Connector Power Charger Jack Port", Package=Package, Check_prices=https://www.snapeda.com/parts/CQ-USB-C16PSMT01/Shenzen+Chuangqin+Technology/view-part/?ref=eda, MF="Shenzen Chuangqin Technology", MP=CQ-USB-C16PSMT01, SnapEDA_Link=https://www.snapeda.com/parts/CQ-USB-C16PSMT01/Shenzen+Chuangqin+Technology/view-part/?ref=snap
Y1: "Crystal", Category=Crystal

## Free pads (board coordinates)
  oval 0x3 hole 3 unplated: 1(59.944,13.335) 1(60.325,26.67)
  oval 0x1.524 hole 3 unplated: 2(5.08,27.559) 3(4.064,4.699)

## Via types
v1: diameter 0.45, hole 0.2, Top Layer to Bottom Layer, 218 vias
v2: diameter 0.5, hole 0.25, Top Layer to Bottom Layer, 29 vias

## Nets (pads, with @x,y where several pads share a name; then routed paths per layer and width w, separated by ;. In a path a pad name is that pad's centre, name@x,y a point inside that pad or via, vN(x,y) a via of type N, cw(c..) or ccw(c..) an arc to the next point about the centre after c; other vN are vias at no path point)
3V3: BOOT.1 C12.2 C13.1 C16.2 C17.2 C18.2 C19.1 C21.2 C23.1 C26.2 C28.1 DS1.2 IC1.5 IC2.5 IC3.5 IC4.5 IC5.5 IC6.3 IC7.5 IC7.6 IC7.7 L1.1 M1.3 M1.7 M1.8 MCU.19 MCU.32 MCU.48 MCU.64 R1.2 R3.2 R4.2 R5.2 R11.2 R12.2 R13.2 R18.2 R19.2 R20.1 R21.1 R22.2 R24.1 R26.1 R27.2 R28.2 | length 57.7
  Top Layer w0.127: v1(6.223,6.858) 6.348,6.733 6.97,6.733 7.382,6.321 R27.2 ; v1(13.97,4.445) 13.97,3.683 R28.2 ; R20.1 29.48,1.524 v1(30.734,1.524) ; v1(40.005,25.781) 41.243,25.781 R26.1 ; v1(42.545,22.225) 43.408,22.225 43.494,22.139 MCU.64 ; MCU.19 44.573,10.497 44.573,11.426 v1(45.085,11.938) ; v1(52.959,8.382) 52.97,8.371 C17.2 ; C16.2 v1(53.975,5.461) ; v1(55.118,6.477) 55.13,6.489 IC7.5@55.785,6.489 ; IC7.6@55.785,5.989 55.794,5.989 55.88,5.903 v1(55.88,5.588) ; v1(55.88,5.08) 56.039,5.239 IC7.7@56.535,5.239 ; BOOT.1 65.151,22.606 v1(65.278,22.479)
  Top Layer w0.15: v2(37.465,3.937) 37.481,3.921 R22.2 ; R21.1 v2(51.181,3.048)
  Top Layer w0.2: MCU.19@44.472,10.352 44.45,10.374 MCU.19 ; MCU.32 51.812,10.418 v1(51.816,10.414) ; v1(51.699,19.921) 51.742,19.963 53.039,19.963 MCU.48 ; R24.1 60.563,1.667 v1(60.579,1.651)
  Bottom Layer w0.127: v1(2.667,19.939) 2.667,18.907 R11.2 ; v1(9.017,20.193) 9.144,20.066 R3.2 ; v1(15.113,26.416) 15.621,26.924 R5.2 ; v1(15.24,11.176) 15.621,10.795 R4.2 ; v1(15.875,14.732) 16.415,14.732 R1.2 ; IC3.5 v1(24.13,11.811) ; IC2.5 24.257,19.177 v1(24.384,19.05) ; v1(24.638,19.685) 25.035,19.288 R13.2 v1(25.908,20.193) ; IC4.5 33.655,14.224 v1(33.909,14.478) ; v1(42.545,22.225) 43.55,21.22 C26.2 ; C19.1 44.461,11.938 v1(45.085,11.938) ; L1.1 47.863,13.87 48.641,13.092 v1(48.641,12.827) ; C21.2 48.054,15.864 48.516,15.402 48.516,14.984 v1(48.768,14.732) ; v1(51.699,19.921) 51.761,19.921 52.911,21.071 C23.1 ; v1(51.816,10.414) 51.896,10.414 52.15,10.16 C18.2 ; v1(61.087,17.653) 61.214,17.78 IC1.5 ; R12.2 71.12,17.399 v1(71.247,17.272) ; C12.2 v1(75.184,20.193) ; v1(77.864,5.79) 77.926,5.728 78.208,5.728 78.343,5.593 79.004,5.593 79.115,5.705 79.115,5.724 79.375,5.984 IC5.5
  Bottom Layer w0.2: M1.7 29.845,8.382 v1(29.972,8.255) ; M1.8 v1(29.845,9.652) ; M1.3 v1(36.703,7.112) ; C28.1 39.867,6.869 v1(40.005,6.731) ; v1(49.53,32.512) 49.53,31.607 R19.2 ; R18.2 v1(57.658,27.559)
  other v1: 77.47,14.097 78.359,14.097 79.248,14.097 77.343,14.986 78.232,14.986 79.248,14.986 77.851,17.907 78.74,17.907 79.502,17.907 80.137,17.907 80.899,17.907 81.534,17.907 78.105,18.542 78.74,18.542 79.502,18.542 80.137,18.542 80.899,18.542 81.534,18.542 78.232,19.304 78.867,19.304 79.502,19.304 80.137,19.304 80.899,19.304 81.534,19.304
+5: C10.1 C11.2 IC6.2 J1.1 R17.1 R23.2 USB.A4_B9 USB.B4_A9 | length 38.2
  Top Layer w0.127: R17.1 35.703,1.778 v1(52.832,1.778)
  Top Layer w0.2: v1(52.832,1.778) 52.848,1.794 R23.2 54.454,1.794 55.581,2.921 67.589,2.921 68.224,3.556 J1.1 ; USB.A4_B9 76.973,8.162 77.343,7.792 v1(77.343,7.366) ; USB.B4_A9 81.773,10.145 v1(81.788,10.16)
  Bottom Layer w0.2: C11.2 68.707,6.339 v1(68.707,4.699)
  other v1: 70.231,9.525 71.374,9.525 72.771,9.525 70.231,10.287 72.644,10.287 71.374,10.414 75.692,10.541 75.311,11.049 76.2,11.049 75.311,11.684 76.2,11.684 75.692,12.319 76.2,12.319
A0: D9.1 J3.1 MCU.26 RP1.2 | length 53.9
  Top Layer w0.127: v1(47.978,12.098) 47.939,12.058 47.939,11.488 47.994,11.433 MCU.26
  Bottom Layer w0.127: v1(47.978,12.098) 47.978,12.037 47.939,11.998 47.939,11.488 48.351,11.076 54.256,11.076 55.88,12.7 55.88,17.352 58.375,19.847 58.56,19.847 68.558,29.845 80.137,29.845 J3.1 81.409,33.4 81.409,34.148 80.997,34.56 RP1.2
  Bottom Layer w0.2: J3.1 D9.1
A1: D10.1 J3.2 MCU.27 RP2.2 | length 47.2
  Top Layer w0.127: v1(48.354,11.66) 48.354,11.576 48.494,11.437 MCU.27
  Bottom Layer w0.127: v1(48.354,11.66) 48.422,11.66 48.753,11.33 54.002,11.33 55.626,12.954 55.626,17.457 58.27,20.101 58.455,20.101 68.58,30.226 75.438,30.226 J3.2 76.329,33.4 76.329,34.148 75.917,34.56 RP2.2
  Bottom Layer w0.2: D10.1@77.343,34.379 D10.1@77.407,34.315 ; J3.2 D10.1
A2: D11.1 J3.3 MCU.28 RP3.2 | length 41.1
  Top Layer w0.127: v1(48.925,11.745) 48.959,11.711 48.959,10.453 MCU.28
  Bottom Layer w0.127: v1(48.925,11.745) 48.987,11.683 49.2,11.683 49.233,11.649 53.962,11.649 55.372,13.059 55.372,17.562 58.164,20.355 58.188,20.355 70.091,32.258 J3.3 70.866,33.782 RP3.2
  Bottom Layer w0.2: J3.3 D11.1
A3: D12.1 J3.4 MCU.55 RP4.2 | length 32.1
  Top Layer w0.127: MCU.55 47.994,23.483 48.516,24.005 48.516,24.175 48.479,24.212 48.479,24.556 48.516,24.593 48.516,27.966 49.185,28.634 56.249,28.634 56.436,28.448 63.5,28.448 J3.4
  Bottom Layer w0.127: RP4.2 65.757,34.56 66.169,34.148 66.169,33.4 J3.4
  Bottom Layer w0.2: J3.4 D12.1
A4: D13.1 J3.5 MCU.56 RP5.2 | length 27.1
  Top Layer w0.127: MCU.56 47.494,23.618 48.225,24.349 48.225,24.661 48.258,24.693 48.258,28.067 49.079,28.888 58.861,28.888 J3.5
  Bottom Layer w0.127: RP5.2 60.706,33.782 J3.5
  Bottom Layer w0.2: J3.5 D13.1
A5: D14.1 J3.6 MCU.57 RP6.2 | length 24.6
  Top Layer w0.127: MCU.57 46.994,25.142 45.976,26.16 45.976,27.966 46.645,28.634 47.004,28.634 47.512,29.142 51.101,29.142 54.216,32.258 J3.6
  Bottom Layer w0.127: RP6.2 55.47,34.56 55.882,34.148 55.882,33.527 J3.6
  Bottom Layer w0.2: J3.6 D14.1
A6: D15.1 J3.7 MCU.58 RP7.2 | length 19.7
  Top Layer w0.127: MCU.58 46.494,25.118 45.722,25.89 45.722,28.072 46.539,28.888 46.899,28.888 48.109,30.099 49.911,30.099 J3.7
  Bottom Layer w0.127: RP7.2 50.517,34.56 50.929,34.148 50.929,33.399 J3.7
  Bottom Layer w0.2: J3.7 D15.1
A7: D16.1 J3.8 MCU.59 RP8.2 | length 18.6
  Top Layer w0.127: MCU.59 45.994,23.729 45.374,24.349 45.374,24.556 43.576,26.353 43.548,26.353 43.436,26.465 43.436,26.493 42.926,27.004 42.926,28.194 J3.8
  Bottom Layer w0.127: RP8.2 44.802,34.56 46.99,32.372 J3.8
  Bottom Layer w0.2: J3.8@46.99,32.372 D16.1
A8: D1.1 J4.1 MCU.61 | length 14.4
  Top Layer w0.127: J4.1 39.624,29.21 44.542,24.292 44.542,24.212 44.786,23.968 44.866,23.968 44.994,23.84 MCU.61
  Bottom Layer w0.2: J4.1 D1.1
A9: D2.1 J4.2 MCU.62 | length 17.3
  Top Layer w0.127: J4.2 37.71,29.092 39.377,29.092 44.288,24.18 44.288,24.107 44.494,23.901 MCU.62
  Bottom Layer w0.2: J4.2 D2.1
A10: D3.1 J4.3 MCU.29 | length 57.5
  Top Layer w0.127: v1(49.403,12.446) 49.448,12.401 49.448,10.464 MCU.29
  Bottom Layer w0.127: J4.3@29.464,32.639 25.527,36.576 23.241,36.576 22.098,35.433 22.098,31.623 23.241,30.48 25.4,30.48 32.004,23.876 37.846,23.876 38.008,23.714 46.597,23.714 49.276,21.035 49.276,12.976 49.39,12.862 49.39,12.459 v1(49.403,12.446)
  Bottom Layer w0.2: J4.3 29.464,32.639 D3.1
A11: D4.1 J4.4 MCU.30 | length 42.8
  Top Layer w0.127: MCU.30 50.016,10.44 50.016,12.551 v1(50.038,12.573)
  Bottom Layer w0.127: J4.4 32.512,24.13 37.951,24.13 38.078,24.003 43.227,24.003 43.262,23.968 43.606,23.968 43.641,24.003 44.751,24.003 44.786,23.968 45.13,23.968 45.165,24.003 46.667,24.003 49.53,21.14 49.53,13.081 v1(50.038,12.573)
  Bottom Layer w0.2: J4.4 D4.1
A12: D5.1 J4.5 MCU.33 | length 61
  Top Layer w0.127: J4.5 19.304,30.861 22.225,27.94 32.298,27.94 38.875,21.362 43.013,21.362 44.09,20.285 50.398,20.285 51.221,21.108 58.775,21.108 59.944,19.939 59.944,16.75 55.7,12.506 MCU.33
  Bottom Layer w0.2: J4.5 D5.1
A13: D6.1 J4.6 MCU.34 | length 64.5
  Top Layer w0.127: J4.6 18.796,27.686 32.193,27.686 38.77,21.108 42.907,21.108 43.984,20.031 50.504,20.031 51.327,20.854 58.648,20.854 59.69,19.812 59.69,16.855 55.841,13.006 MCU.34
  Bottom Layer w0.2: J4.6 D6.1
A14: D7.1 J4.7 MCU.35 | length 71.1
  Top Layer w0.127: J4.7 9.144,28.194 9.906,27.432 32.087,27.432 38.665,20.854 42.802,20.854 43.879,19.777 50.609,19.777 51.432,20.6 58.542,20.6 59.436,19.707 59.436,16.96 55.982,13.506 MCU.35
  Bottom Layer w0.2: J4.7 D7.1
A15: D8.1 J4.8 MCU.36 | length 72.9
  Top Layer w0.127: J4.8 9.144,27.178 31.982,27.178 38.56,20.6 42.697,20.6 43.774,19.523 50.714,19.523 51.537,20.346 58.437,20.346 59.182,19.602 59.182,17.065 56.123,14.006 MCU.36
  Bottom Layer w0.2: J4.8 D8.1
BOOT: IC1.6 MCU.60 | length 24.9
  Top Layer w0.127: v1(44.958,24.384) 45.494,23.848 MCU.60 ; v1(48.895,24.384) 50.419,25.908 v1(54.864,25.908) ; v1(56.007,24.13) 56.598,24.13 60.281,20.447 v1(60.96,20.447)
  Bottom Layer w0.127: v1(44.958,24.384) v1(48.895,24.384) ; v1(54.864,25.908) 54.864,25.273 v1(56.007,24.13) ; v1(60.96,20.447) 60.96,20.305 62.835,18.43 IC1.6
BOOTB: C2.2 IC1.1 R2.1 R7.2 | length 7.9
  Bottom Layer w0.127: IC1.1 65.435,18.43 67.451,20.445 67.903,20.445 68.365,20.907 C2.2 68.215,21.232 R2.1 R7.2
D_N: IC5.4 USB.A7 USB.B7 | length 5.7
  Top Layer w0.2: USB.B7 78.673,8.961 78.673,8.136 78.74,8.069 v1(78.74,8.001) 78.74,7.947 79.13,7.557 79.504,7.557 79.769,7.822 79.769,8.196 79.673,8.292 79.673,8.961 USB.A7
  Bottom Layer w0.2: IC5.4 78.725,6.684 78.948,6.907 78.948,6.978 79.175,7.205 79.175,7.371 78.965,7.581 78.965,7.709 78.74,7.933 v1(78.74,8.001)
D_P: IC5.6 USB.A6 USB.B6 | length 6
  Top Layer w0.2: v1(79.317,8.009) 79.317,8.077 79.173,8.221 79.173,8.961 USB.A6 79.123,10.031 79.379,10.287 79.883,10.287 80.137,10.033 USB.B6
  Bottom Layer w0.2: 79.365,7.747 79.575,7.536 79.575,7.205 79.802,6.978 79.802,6.907 80.025,6.684 IC5.6
DOWN: IC3.6 MCU.51 | length 42.1
  Top Layer w0.127: v1(28.575,15.24) 28.575,24.638 30.699,26.762 v1(30.734,26.762) v1@30.734,26.797 ; v1(49.911,24.257) 49.952,24.216 49.952,22.136 MCU.51
  Bottom Layer w0.127: IC3.6 24.496,11.161 v1(28.575,15.24) ; v1(30.734,26.762) 32.062,25.435 39.764,25.435 39.833,25.365 48.803,25.365 v1(49.911,24.257)
DOWNB: C4.2 IC3.1 R4.1 R9.2 | length 6.6
  Bottom Layer w0.127: C4.2 18.68,8.806 R9.2 R4.1 20.432,10.795 20.798,11.161 IC3.1
ENTER: IC2.6 MCU.39 | length 39
  Top Layer w0.127: v1(37.719,17.145) 37.719,16.079 36.447,14.807 36.447,13.828 37.195,13.081 v1(38.608,13.081) ; v1(51.562,15.494) 51.568,15.5 53.076,15.5 MCU.39
  Bottom Layer w0.127: IC2.6 28.962,18.527 29.402,18.087 36.777,18.087 v1(37.719,17.145) ; v1(38.608,13.081) 47.752,13.081 48.713,12.12 48.753,12.161 49.099,12.161 49.229,12.03 50.384,12.03 51.562,13.208 v1(51.562,15.494)
ENTERB: C1.2 IC2.1 R1.1 R6.2 | length 6.7
  Bottom Layer w0.127: C1.2@18.721,19.102 18.721,18.927 C1.2@18.796,18.852 ; R1.1 R6.2 C1.2@18.796,18.852 ; IC2.1 19.121,18.527 C1.2@18.796,18.852
GND: +3V3.1 +5V.1 C1.1 C2.1 C3.1 C4.1 C5.1 C6.1 C7.1 C8.1 C9.1 C10.2 C11.1 C12.1 C13.2 C14.1 C15.1 C16.1 C17.1 C18.1 C19.2 C20.2 C21.1 C22.1 C23.2 C24.1 C25.2 C26.1 C27.1 C28.2 D1.2 D2.2 D3.2 D4.2 D5.2 D6.2 D7.2 D8.2 D9.2 D10.2 D11.2 D12.2 D13.2 D14.2 D15.2 D16.2 DOWN.1 DS1.1 ENTER.1 IC1.2 IC2.2 IC3.2 IC4.2 IC5.2 IC6.1 IC7.2 IC7.25 J1.2 J2.3 LEFT.1 M1.4 MCU.12 MCU.18 MCU.63 R2.2 R25.1 RCC1.1 RCC2.1 RIGHT.1 RP1.1 RP2.1 RP3.1 RP4.1 RP5.1 RP6.1 RP7.1 RP8.1 RST.1 SP.1 T1.2@12.326,1.59 T2.2@21.604,1.717 UP.1 USB.A1_B12 USB.B1_A12 USB.S1 USB.S2 USB.S3 USB.S4 | length 89
  Top Layer w0.127: v1(4.953,10.287) SP.1 ; v1(10.922,10.541) 11.049,10.668 RIGHT.1 ; UP.1 25.146,25.019 v1(25.273,24.892) ; DOWN.1 25.273,8.89 v1(25.4,8.763) ; ENTER.1 23.827,15.924 v1(23.876,15.875) ; LEFT.1 v1(28.526,12.495) 28.702,12.319 ; v1(32.512,25.019) 32.512,24.395 C24.1 ; C27.1 32.893,13.578 v1(32.893,12.446) ; MCU.12 42.827,14.506 v1(42.926,14.605) ; v1(43.434,24.384) 43.994,23.824 MCU.63 ; v1(54.61,8.128) 54.697,8.128 54.83,7.995 IC7.2@55.767,7.995 ; C20.2 v1(58.547,19.431) 58.582,19.431 58.801,19.212 ; RST.1 63.168,19.861 v1(63.246,19.939)
  Top Layer w0.2: v1(43.873,9.183) 43.873,9.251 43.944,9.322 43.944,10.368 MCU.18 ; v1(48.006,5.715) 48.122,5.831 C25.2 ; v1(51.054,4.191) 51.17,4.307 C16.1 ; C17.1 51.308,7.631 v1(51.308,8.509) ; R25.1 56.613,1.794 57.264,1.143 v1(57.531,1.143) ; C15.1 63.754,7.123 v1(63.754,5.969) ; v1@75.931,7.569 75.931,8.1 75.973,8.142 75.973,8.811 USB.A1_B12 ; v1(82.55,10.033) 82.573,10.01 USB.B1_A12
  Bottom Layer w0.127: C6.1 v1(6.858,19.812) ; v1(11.303,1.524) 11.369,1.59 T1.2@12.326,1.59 ; C3.1 12.827,19.812 v1(13.208,20.193) ; v1(15.367,6.604) 15.494,6.731 C4.1 ; v1(15.494,22.86) 16.499,22.86 C5.1 ; v1(15.621,19.304) 15.748,19.177 C1.1 ; v1(20.066,11.811) IC3.2 ; v1(20.447,1.651) 20.513,1.717 T2.2@21.604,1.717 ; v1(20.574,19.177) IC2.2 ; v1(28.575,14.097) 28.702,14.224 IC4.2 ; C8.1 29.972,19.265 v1(29.972,20.32) ; C9.1 38.597,22.998 v1(38.608,22.987) ; v1(41.275,11.684) 41.656,12.065 C19.2 ; v1(44.45,17.78) 45.731,17.78 C22.1 ; v2(44.45,37.973) 44.577,37.846 RP8.1 ; C26.1 45.731,20.701 v1(46.482,20.701) ; C21.1 v1(47.879,18.796) ; RP7.1 50.292,37.465 v2(50.419,37.592) ; v1(51.943,22.733) 52.081,22.871 C23.2 ; C18.1 v1(55.753,10.16) ; RP6.1 55.245,37.592 v2(55.372,37.719) ; RP5.1 v2(60.706,37.465) ; IC1.2 v1(66.294,17.78) ; v2(65.405,37.719) 65.532,37.592 RP4.1 ; v1(69.596,13.716) 70.165,14.285 C7.1 ; C2.1 70.292,21.209 v1(71.628,21.209) ; R2.2 v1(71.247,22.733) ; RP3.1 v2(70.866,37.719) ; v1(75.184,16.383) C12.1 ; v2(75.565,37.465) 75.692,37.338 RP2.1 ; v1(76.327,3.048) 76.581,3.302 RCC1.1 ; IC5.2 79.375,5.207 v1(79.502,5.334) ; v2(80.645,37.465) 80.772,37.338 RP1.1 ; v1(81.788,3.302) RCC2.1 ; D9.2 D9.2@82.55,36.034
  Bottom Layer w0.2: D8.2 4.108,35.896 4.654,35.896 v2(4.699,35.941) ; D7.2 9.741,35.852 v2(9.779,35.814) ; D6.2 14.77,35.852 v2(14.859,35.941) ; D5.2 19.901,35.852 v2(19.939,35.814) ; D4.2 24.854,35.852 v2(24.892,35.814) ; D3.2 30.061,35.852 v2(30.099,35.814) ; v1(34.163,5.969) 34.29,5.842 M1.4 ; D2.2 v2(35.268,35.852) ; C14.1 38.746,10.53 v1(38.989,10.287) ; C28.2 38.619,5.207 v1(39.878,5.207) ; D1.2 40.348,35.852 v2(40.386,35.814) ; D16.2 47.587,35.979 v2(47.625,35.941) ; D15.2 52.616,35.979 v2(52.705,36.068) ; D14.2 58.001,35.979 v2(58.039,35.941) ; D13.2 62.954,35.979 v2(62.992,35.941) ; D12.2 68.034,35.979 v2(68.072,35.941) ; C11.1 v1(71.755,6.35) ; D11.2 72.987,35.979 v2(73.025,35.941) ; D10.2 78.194,35.979 v2(78.232,35.941) ; D9.2 83.147,35.979 v2(83.185,35.941)
  other v1: 57.023,6.477 57.785,6.477 58.547,6.477 57.023,7.239 57.785,7.239 58.547,7.239 75.946,7.366 57.023,8.001 57.785,8.001 58.547,8.001 83.947,11.049 84.582,11.049 85.217,11.049 83.947,11.557 84.582,11.684 85.217,11.684 62.611,12.065 63.627,12.065 83.947,12.192 84.582,12.192 85.217,12.192 63.246,12.7 83.947,12.7 84.582,12.7 64.008,12.827 85.217,12.827 84.455,13.97 82.55,14.224 83.439,14.224 82.423,14.859 83.312,14.859 84.201,14.859 84.963,14.859
LED1: MCU.8 R29.1 | length 35.1
  Top Layer w0.127: v1(15.24,1.524) 15.24,1.642 16.594,2.996 20.221,2.996 25.895,8.671 34.785,8.671 39.116,13.001 39.116,15.494 40.128,16.506 MCU.8
  Bottom Layer w0.127: R29.1 14.113,1.524 v1(15.24,1.524)
LED2: MCU.9 R30.1 | length 26.6
  Top Layer w0.127: v1(24.638,1.524) 24.638,3.614 28.864,7.839 34.636,7.839 39.571,12.774 39.571,14.884 40.534,15.846 40.553,15.846 40.712,16.006 MCU.9
  Bottom Layer w0.127: R30.1 24.408,1.667 24.551,1.524 v1(24.638,1.524)
LEFT: IC4.6 MCU.53 | length 21.5
  Top Layer w0.127: v1(48.86,20.701) 48.922,20.763 48.922,22.022 MCU.53
  Bottom Layer w0.127: IC4.6 35.318,13.574 40.124,18.38 46.701,18.38 48.603,20.282 48.603,20.371 48.86,20.629 v1(48.86,20.701)
LEFTB: C8.2 IC4.1 R13.1 R16.2 | length 8.5
  Bottom Layer w0.127: R13.1 25.958,17.338 C8.2 29.845,15.859 30.552,15.153 30.552,13.945 30.44,13.834 30.421,13.834 30.161,13.574 IC4.1
NetBOOT1_2: BOOT.2 R7.1 | length 3.6
  Top Layer w0.127: v1(72.136,23.749) 72.136,23.192 BOOT.2
  Bottom Layer w0.127: R7.1 71.374,24.511 v1(72.136,23.749)
NetC15_2: C15.2 IC7.16 | length 2
  Top Layer w0.2: IC7.16@59.785,7.489 61.588,7.489 C15.2
NetC20_1: C20.1 MCU.47 | length 2.4
  Top Layer w0.2: MCU.47 55.413,19.506 C20.1
NetC22_2: C22.2 L1.2 MCU.13 | length 6.4
  Top Layer w0.127: MCU.13 41.424,13.988 43.035,13.988 v1(43.053,13.97)
  Bottom Layer w0.127: v1(43.053,13.97) L1.2 45.863,15.848 C22.2
NetC25_1: C25.1 MCU.31 | length 3.2
  Top Layer w0.2: C25.1 49.403,8.509 50.444,9.55 50.444,10.368 MCU.31
NetDOWN1_2: DOWN.2 R9.1 | length 3.6
  Top Layer w0.127: DOWN.2 14.986,9.349 v1(14.986,10.033)
  Bottom Layer w0.127: v1(14.986,10.033) 16.129,8.89 R9.1
NetENTER1_2: ENTER.2 R6.1 | length 3.8
  Top Layer w0.127: ENTER.2 14.63,17.145 15.367,16.408 v1(15.367,15.875)
  Bottom Layer w0.127: v1(15.367,15.875) 16,16.508 16.384,16.508 16.796,16.92 R6.1
NetIC7_8: IC7.8 R23.1 R25.2 | length 4
  Top Layer w0.2: R23.1 R25.2 56.613,3.794 57.035,4.216 IC7.8@57.035,5.239
NetIC7_9: IC7.9 R24.2 | length 2.7
  Top Layer w0.2: IC7.9@57.535,5.239 57.585,5.189 57.585,4.137 58.045,3.677 58.918,3.677 R24.2
NetIC7_13: IC7.13 RX1.1 | length 17.9
  Top Layer w0.127: v2(59.944,5.08) 59.944,5.948 IC7.13
  Bottom Layer w0.127: RX1.1 46.482,6.223 46.482,6.182 46.534,6.131 50.511,6.131 53.086,3.556 59.817,3.556 59.944,3.683 v2(59.944,5.08)
NetIC7_14: IC7.14 TX1.1 | length 26.5
  Top Layer w0.127: TX1.1 43.688,3.048 v2(43.688,2.667) ; IC7.14 60.844,6.489 61.028,6.306 61.451,6.306 v2(61.468,6.289)
  Bottom Layer w0.127: v2(43.688,2.667) 44.248,2.107 52.311,2.107 52.616,2.413 59.563,2.413 61.468,4.318 v2(61.468,6.289) v2@61.468,6.35
NetLD1_2: +5V.2 R17.2 | length 3.1
  Top Layer w0.127: +5V.2 35.544,3.937 R17.2
NetLD2_2: +3V3.2 R20.2 | length 3
  Top Layer w0.127: +3V3.2 29.067,3.937 R20.2
NetLD3_1: T1.1@8.509,1.651 T1.3 | length 1.9
  Bottom Layer w0.127: T1.1@8.509,1.651 9.162,2.304 9.79,2.304 T1.3
NetLD3_2: R27.1 T1.2@8.509,4.191 | length 2.3
  Top Layer w0.127: T1.2@8.509,4.191 8.643,4.325 8.643,5.132 9.382,5.871 R27.1
NetLD4_1: T2.1@16.764,1.397 T2.3 | length 3.1
  Bottom Layer w0.127: T2.1@16.764,1.397 18.034,2.667 T2.3
NetLD4_2: R28.1 T2.2@16.764,3.937 | length 3.7
  Top Layer w0.127: R28.1 14.322,1.556 16.703,3.937 T2.2@16.764,3.937
NetLEFT1_2: LEFT.2 R16.1 | length 4.6
  Top Layer w0.127: v1(25.908,21.59) 26.113,21.795 LEFT.2
  Bottom Layer w0.127: v1(25.908,21.59) 27.176,20.322 27.176,19.7 27.588,19.288 R16.1
NetMCU1_1: MCU.1 R26.2 | length 5.4
  Top Layer w0.127: v1(40.259,19.931) 40.297,19.968 41.368,19.968 MCU.1 ; v1(41.275,21.778) R26.2
  Bottom Layer w0.127: v1(40.259,19.931) 40.259,19.939 41.275,20.955 v1(41.275,21.778)
NetR8_1: R8.1 RIGHT.2 | length 2.4
  Top Layer w0.127: v1(11.049,19.939) RIGHT.2
  Bottom Layer w0.127: R8.1 v1(11.049,19.939)
NetR10_1: R10.1 UP.2 | length 3.8
  Top Layer w0.127: UP.2 14.986,24.433 v1(14.986,23.749)
  Bottom Layer w0.127: v1(14.986,23.749) 15.619,24.382 16.241,24.382 16.653,24.794 R10.1
NetR14_1: R14.1 SP.2 | length 2.9
  Top Layer w0.127: SP.2 4.953,20.066 v1(5.08,19.939)
  Bottom Layer w0.127: R14.1 4.826,19.605 5.08,19.859 v1(5.08,19.939)
NetR15_1: R15.1 RST.2 | length 3.6
  Top Layer w0.127: v1(72.263,19.812) 72.263,19.738 72.468,19.533 RST.2
  Bottom Layer w0.127: R15.1 71.755,19.304 v1(72.263,19.812)
NetR21_2: R21.2 RX1.2 | length 2.3
  Top Layer w0.15: RX1.2 R21.2
NetR22_1: R22.1 TX1.2 | length 1.7
  Top Layer w0.15: R22.1 TX1.2
NetR29_2: R29.2 T1.1@12.326,3.49 | length 1.8
  Bottom Layer w0.127: T1.1@12.326,3.49 14.047,3.49 R29.2
NetR30_2: R30.2 T2.1@21.604,3.617 | length 1.8
  Bottom Layer w0.127: T2.1@21.604,3.617 23.318,3.617 R30.2
NetRCC1_2: RCC1.2 USB.A5 | length 4
  Top Layer w0.127: v1(77.724,6.35) 78.123,6.749 USB.A5
  Bottom Layer w0.127: RCC1.2 77.51,6.223 77.637,6.35 v1(77.724,6.35)
NetRCC2_2: RCC2.2 USB.B5 | length 2.9
  Top Layer w0.127: USB.B5 81.123,7.396 v1(81.407,7.112)
  Bottom Layer w0.127: v1(81.407,7.112) 81.407,6.731 RCC2.2
NRST: J2.2
RCC_OSC32_IN: C24.2 MCU.3 Y1.1 | length 11.1
  Top Layer w0.127: C24.2 Y1.1 37.688,20.346 38.483,19.551 38.483,19.192 38.668,19.006 MCU.3
RCC_OSC32_OUT: C27.2 MCU.4 Y1.2 | length 12.2
  Top Layer w0.127: C27.2 32.893,15.632 Y1.2 34.098,17.246 36.819,19.968 37.707,19.968 38.229,19.446 38.229,19.087 38.809,18.506 MCU.4
RCC_OSC_IN: C9.2 MCU.5 Q1.2 | length 6.6
  Top Layer w0.127: Q1.2 38.409,18.006 MCU.5
  Bottom Layer w0.127: Q1.2 C9.2
RCC_OSC_OUT: C14.2 MCU.6 Q1.1 | length 7.5
  Top Layer w0.127: Q1.1 37.338,14.541 37.659,14.863 37.659,14.881 40.284,17.506 MCU.6
  Bottom Layer w0.127: C14.2 Q1.1
RIGHT: IC3.4 MCU.52 | length 45.7
  Top Layer w0.127: v1(29.083,15.748) 30.638,17.303 30.638,23.78 32.293,25.435 33.366,25.435 38.455,20.346 42.592,20.346 43.669,19.269 50.088,19.269 50.23,19.127 50.23,18.858 v1(50.292,18.796) ; MCU.52 49.512,22.112 49.512,23.477 v1(49.53,23.495)
  Bottom Layer w0.127: IC3.4 23.398,12.461 26.685,15.748 v1(29.083,15.748) ; v1(49.53,23.495) 50.292,22.733 v1(50.292,18.796)
RIGHTB: C3.2 IC3.3 R3.1 R8.2 | length 14
  Bottom Layer w0.127: R3.1 R8.2 13.052,17.161 13.464,16.749 13.464,16.556 17.558,12.461 IC3.3
RST: IC1.4 MCU.7 | length 24.9
  Top Layer w0.127: MCU.7 51.574,17.006 v1(51.689,16.891) ; v1(54.737,14.732) 56.489,14.732 58.582,16.824 58.582,17.688 58.766,17.872 v1(58.766,17.907) v1@58.801,17.907
  Bottom Layer w0.127: v1(51.689,16.891) 53.848,14.732 v1(54.737,14.732) ; v1(58.766,17.907) 59.436,17.237 63.027,17.237 IC1.4
RSTB: C7.2 IC1.3 R12.1 R15.2 | length 7.2
  Bottom Layer w0.127: IC1.3 67.946,17.13 R12.1 ; R15.2 R12.1 ; C7.2 68.215,15.517 R12.1
SCL: DS1.3 MCU.41 R19.1 | length 17.2
  Top Layer w0.2: MCU.41 53.084,16.508 54.354,16.508 v1(54.356,16.51)
  Bottom Layer w0.2: R19.1@49.911,29.226 R19.1 DS1.3 51.634,25.517 52.417,25.517 54.61,23.324 54.61,20.078 54.356,19.824 v1(54.356,16.51)
SDA: DS1.4 MCU.40 R18.1 | length 16.5
  Top Layer w0.2: MCU.40 54.665,16.006 54.796,15.875 v1(54.864,15.875)
  Bottom Layer w0.2: R18.1 54.18,27.494 DS1.4 54.991,24.7 54.991,16.07
SPARE: IC4.4 MCU.54 | length 20.5
  Top Layer w0.127: v1(48.482,21.137) 48.488,21.143 48.488,22.088 MCU.54
  Bottom Layer w0.127: IC4.4 33.717,14.874 33.829,14.986 36.371,14.986 40.054,18.669 46.609,18.669 48.26,20.32 48.26,20.827 48.482,21.049 v1(48.482,21.137)
SPAREB: C6.2 IC4.3 R11.1 R14.2 | length 36.8
  Bottom Layer w0.127: R11.1 R14.2 6.808,16.78 C6.2 7.033,16.83 7.495,16.368 7.495,14.556 11.345,10.706 11.345,10.039 15.543,5.84 19.683,5.84 28.667,14.824 28.747,14.824 28.797,14.874 IC4.3
SPI1_MISO: M1.2 MCU.22 | length 12.7
  Top Layer w0.127: v1(45.974,8.763) 45.984,8.773 45.984,10.408 MCU.22
  Bottom Layer w0.127: M1.2 37.897,8.382 38.024,8.255 40.858,8.255 41.019,8.093 45.171,8.093 45.175,8.089 45.519,8.089 45.763,8.333 45.763,8.345 45.912,8.495 45.912,8.701 v1(45.974,8.763)
SPI1_MOSI: M1.5 MCU.23 | length 22.5
  Top Layer w0.127: MCU.23 46.543,10.369 46.543,9.39 46.609,9.324 v1(46.609,8.89)
  Bottom Layer w0.127: M1.5 33.401,5.842 34.89,4.353 37.259,4.353 37.283,4.377 37.647,4.377 37.671,4.353 42.152,4.353 46.609,8.81 v1(46.609,8.89)
SPI1_NSS: M1.1 MCU.20 | length 11.4
  Top Layer w0.127: v1(44.831,8.763) 44.831,8.85 44.994,9.013 MCU.20
  Bottom Layer w0.127: M1.1 37.346,9.652 38.235,8.763 v1(44.831,8.763)
SPI1_SCK: M1.6 MCU.21 | length 20.2